# Altium PCB PCB2.PcbDoc
Units mil, origin at the board's own origin, x right, y up, seen from the top; angles counter-clockwise.
Board outline 5105.03 x 4010.03 mil, 2 copper layers (Top Layer, Bottom Layer); 6 components, 24 nets, 89 pads, 3 vias.
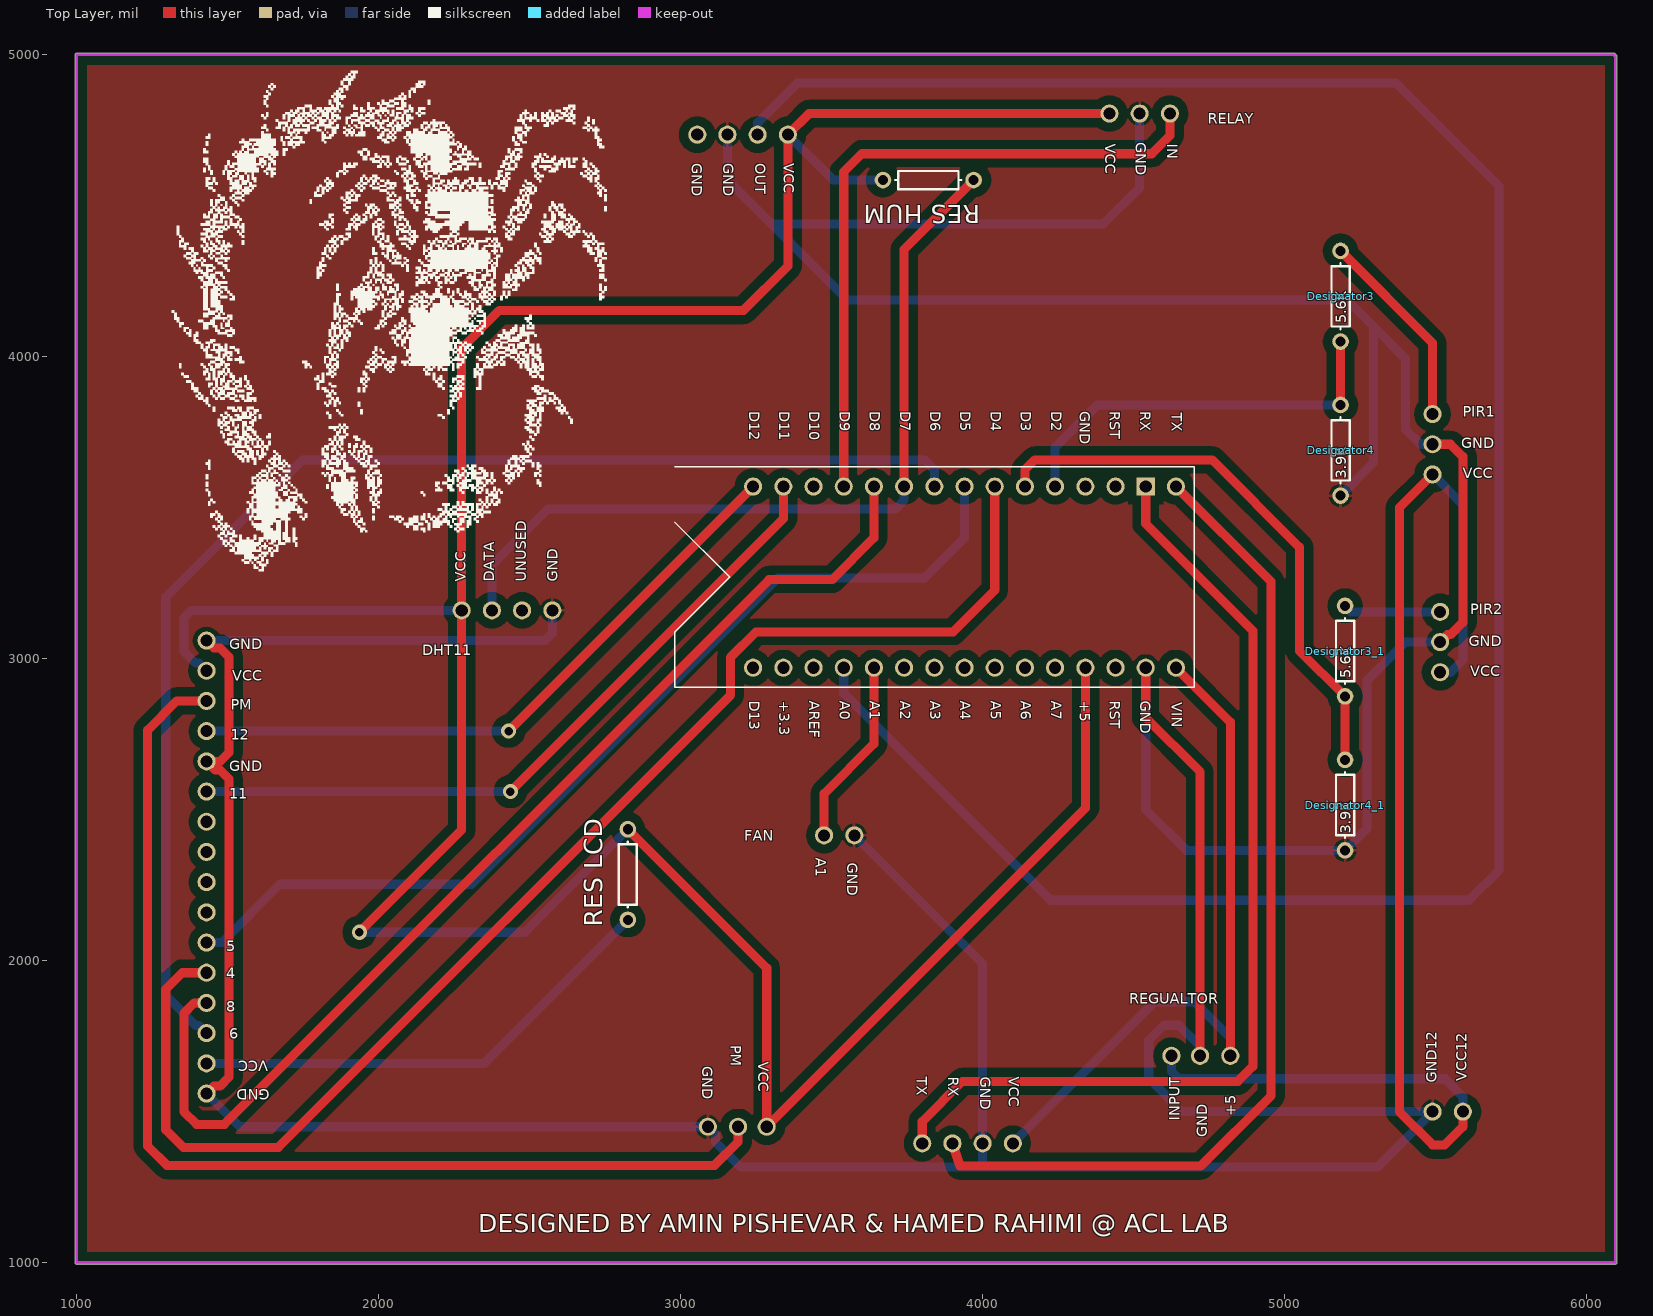
[diagram p0: Top Layer view]
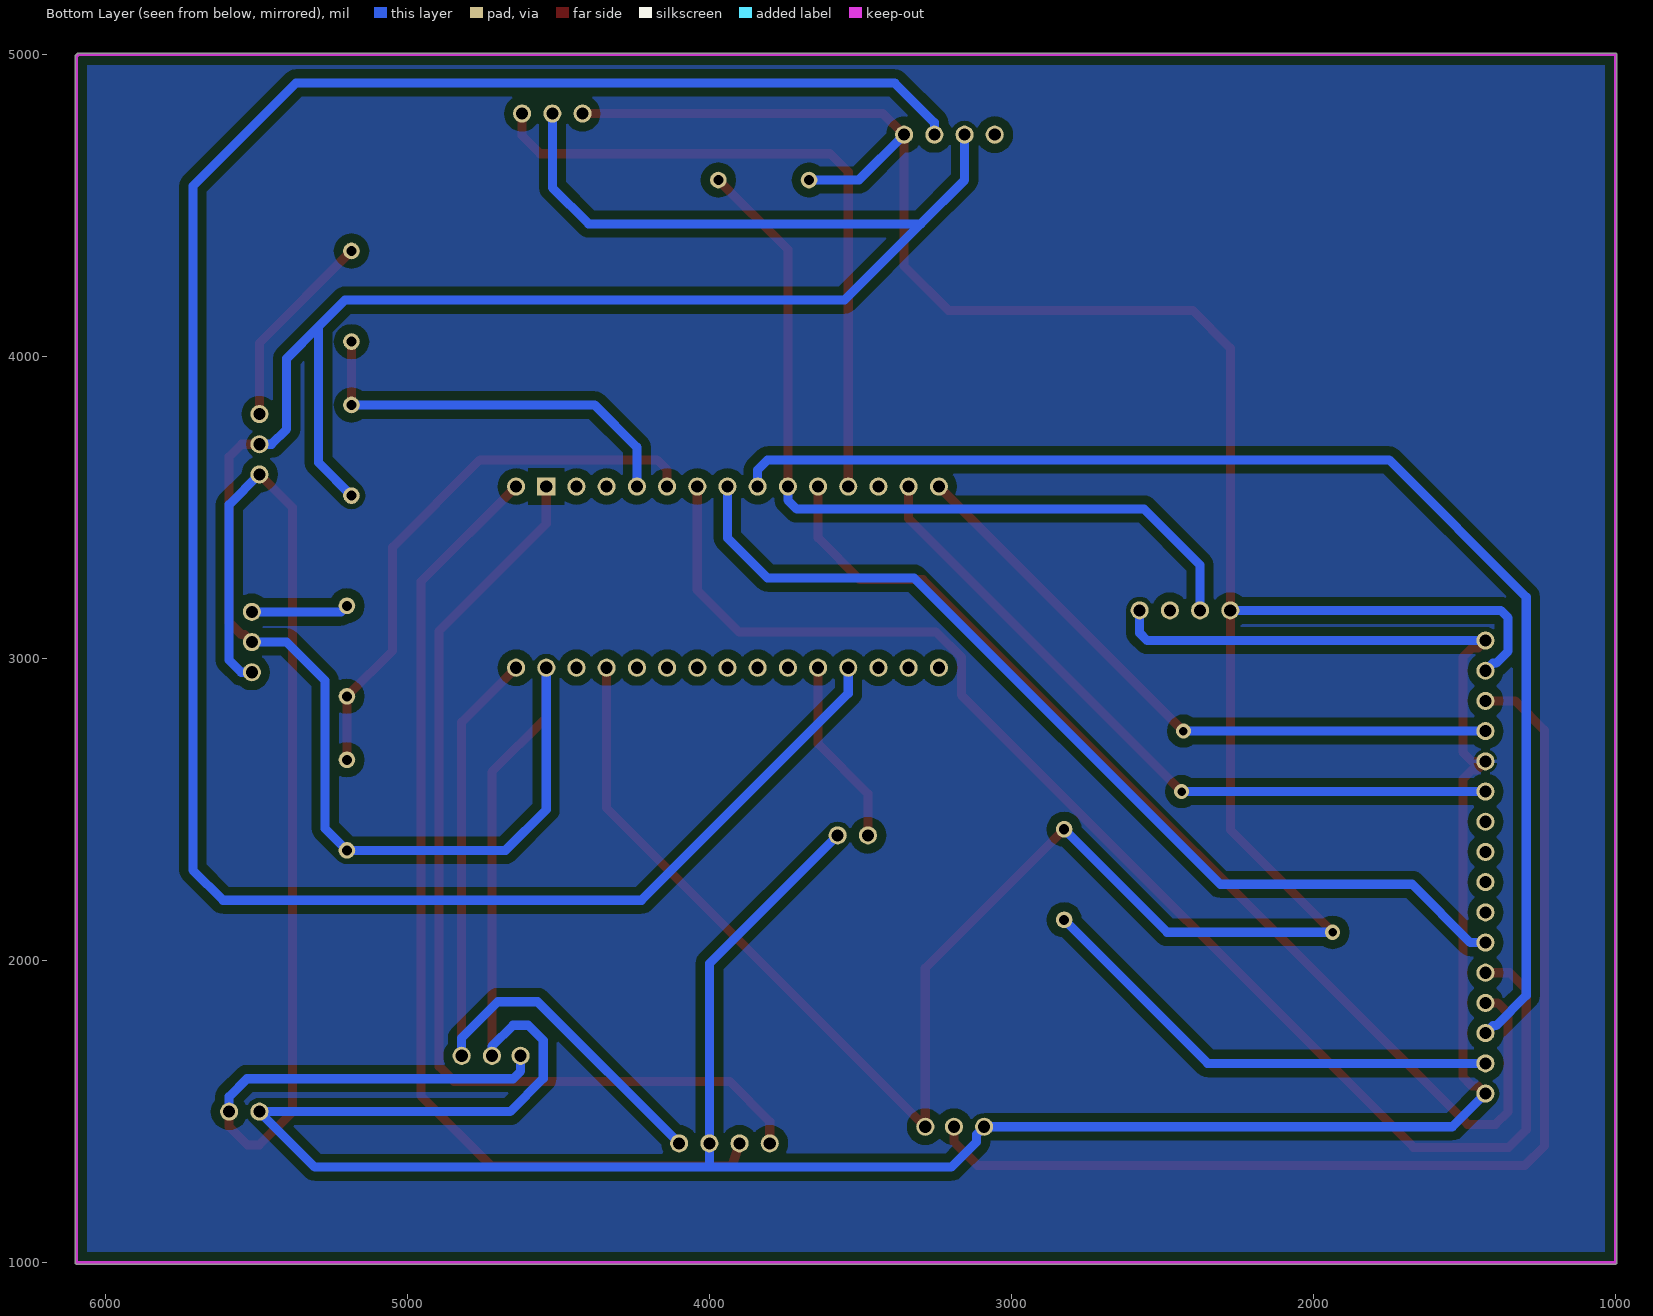
[diagram p1: Bottom Layer view, seen from below]

## Layer stack, top to bottom
Top Solder: solder mask 0.4, Solder Resist, Dk 3.5
Top Layer: signal copper 1.4
Dielectric 1: dielectric 12.6, FR-4, Dk 4.8
Bottom Layer: signal copper 1.4
Bottom Solder: solder mask 0.4, Solder Resist, Dk 3.5

## Board outline
1000,994.99 cw(c1000,1000) 994.99,1000 994.99,5000 cw(c1000,5000) 1000,5005.02 6090,5005.02 cw(c6090,5000) 6095.02,5000.02 cw(c6095,4995) 6100.02,4995 6100.02,1000 cw(c6095,1000) 6095,994.99

## Design rules (kind name [scope] priority, off if disabled: settings)
Clearance [All] p1: gap=30
PolygonConnect [All] p1: connectstyle=Relief reliefconductorwidth=10 reliefentries=4 polygonreliefangle="90 Angle" airgapwidth=10
RoutingVias [All] p1: holewidth=28 width=50 viastyle="Through Hole" minholewidth=28 minwidth=50 maxholewidth=28 maxwidth=50
SolderMaskExpansion [All] p1: expansion=4
Width [All] p1: maxlimit=40 minlimit=20 preferedwidth=30
30 further rules are at their usual default settings.

## Components (designator, comment, footprint, x,y, rotation, side; value= is the part's Value field where it differs from the comment)
Designator3 "Comment" AXIAL-0.3 5185,4200 r90 top
Designator3_1 "Comment" AXIAL-0.3 5200,3025 r90 top
Designator4 "Comment" AXIAL-0.3 5185,3690 r90 top
Designator4_1 "Comment" AXIAL-0.3 5200,2515 r90 top
"RES HUM" "Comment" AXIAL-0.3 3820,4585 r180 top
"RES LCD" "Comment" AXIAL-0.3 2825,2285 r90 top

## Footprints (in the part's own frame and the unit in brackets; to place one, negate y for a bottom-side part, rotate by r counter-clockwise, add the part's x,y. Pads: shape width x height; smd on the part's side, far side on the other; paste and mask are expansions set on the pad)
AXIAL-0.3 [mm] "Axial Device, Thru-Hole; 2 Leads; 0.3 in Pin Spacing"
  round 1.4 hole 0.85: 1(-3.81,0) 2(3.81,0)
  silkscreen extent -2.77,-0.76 2.77,0.76

## Free pads (board coordinates)
  round 60 hole 40: 0(3575,2415) 0(4420,4805) 0(5490,3610) 0(5515,2955) 0(5590,1500) 1(1430,1560) 1(3475,2415) 1(4520,4805) 1(5490,1500) 1(5490,3710) 1(5515,3055) 2(1430,1660) 2(4620,4805) 2(5490,3810) 2(5515,3155) 3(1430,1760) 3(2575,3160) 3(3055,4735) 3(3090,1450) 3(3190,1450) 3(3240,3570) 3(3800,1395) 3(4720,1685) 3(4820,1685) 4(1430,1860) 4(2475,3160) 4(3155,4735) 4(3285,1450) 4(3340,3570) 4(3900,1395) 4(4625,1685) 5(1430,1960) 5(2375,3160) 5(3255,4735) 5(3440,3570) 5(4000,1395) 6(1430,2060) 6(2275,3160) 6(3355,4735) 6(3540,3570) 6(4100,1395) 7(1430,2160) 7(3640,3570) 8(1430,2260) 8(3740,3570) 9(1430,2360) 9(3840,3570) 10(1430,2460) 10(3940,3570) 11(1430,2560) 11(4040,3570) 12(1430,2660) 12(4140,3570) 13(1430,2760) 13(4240,3570) 14(1430,2860) 14(4340,3570) 15(1430,2960) 15(4440,3570) 16(1430,3060) 17(4640,3570) 20(3240,2970) 21(3340,2970) 22(3440,2970) 23(3540,2970) 24(3640,2970) 25(3740,2970) 26(3840,2970) 27(3940,2970) 28(4040,2970) 29(4140,2970) 30(4240,2970) 31(4340,2970) 32(4440,2970) 33(4540,2970) 34(4640,2970)
  rect 60x60 hole 40: 16(4540,3570)

## Via types
v1: diameter 50, hole 28, Top Layer to Bottom Layer, 3 vias

## Nets (pads, with @x,y where several pads share a name; then routed paths per layer and width w, separated by ;. In a path a pad name is that pad's centre, name@x,y a point inside that pad or via, vN(x,y) a via of type N, cw(c..) or ccw(c..) an arc to the next point about the centre after c; other vN are vias at no path point)
2: 
3: 
4: pad.5@1430,1960 pad.11@4040,3570 | length 4572.3
  Top Layer w30: pad.5@1430,1960 1350,1960 1295,1905 1295,1440 1353,1382 1668,1382 3165,2879 3165,3004 3250,3089 3902,3089 4040,3227 pad.11@4040,3570
5: pad.6@1430,2060 pad.10@3940,3570 | length 3235
  Bottom Layer w30: pad.6@1430,2060 1480,2060 1673,2253 2307.9,2253 3321.9,3267 3807,3267 3940,3400 pad.10@3940,3570
6: pad.3@1430,1760 pad.9@3840,3570 | length 4307.5
  Bottom Layer w30: pad.3@1430,1760 1405,1785 1395,1785 1295,1885 1295,3204.03 1748.97,3658 3807,3658 3840,3625 pad.9@3840,3570
7: "RES HUM.1" pad.5@2375,3160 pad.8@3740,3570 | length 2759.3
  Top Layer w30: pad.8@3740,3570 3740,4355 3970,4585
  Bottom Layer w30: pad.5@2375,3160 2375,3310 2560,3495 3710,3495 3740,3525 pad.8@3740,3570
8: pad.4@1430,1860 pad.7@3640,3570 | length 3691.3
  Top Layer w30: pad.4@1430,1860 1390,1860 1355,1825 1355,1500 1397,1458 1489,1458 3293,3262 3502,3262 3640,3400 pad.7@3640,3570
9: pad.2@4620,4805 pad.6@3540,3570 | length 2244.7
  Top Layer w30: pad.6@3540,3570 3540,4612 3600,4672 4560,4672 4620,4732 pad.2@4620,4805
11: pad.4@3340,3570 pad.11@1430,2560 | length 2390.4
  Top Layer w30: v1(2436,2560) 3340,3464 pad.4@3340,3570
  Bottom Layer w30: pad.11@1430,2560 v1(2436,2560)
12: pad.3@3240,3570 pad.13@1430,2760 | length 2145.5
  Top Layer w30: v1(2430,2760) pad.3@3240,3570
  Bottom Layer w30: pad.13@1430,2760 v1(2430,2760)
A0: pad.5@3255,4735 pad.23 | length 7535.7
  Bottom Layer w30: pad.5@3255,4735 3255,4775 3386,4906 5369,4906 5710,4565 5710,2300 5610,2200 4225,2200 3540,2885 pad.23
A1: pad.1@3475,2415 pad.24 | length 623.3
  Top Layer w30: pad.1@3475,2415 3475,2553 3640,2718 pad.24
GND: Designator4.1 Designator4_1.1 pad.0@3575,2415 pad.1@1430,1560 pad.1@4520,4805 pad.1@5490,1500 pad.1@5490,3710 pad.1@5515,3055 pad.3@2575,3160 pad.3@3090,1450 pad.3@4720,1685 pad.4@3155,4735 pad.5@4000,1395 pad.12@1430,2660 pad.16@1430,3060 pad.33 | length 19108.6
  Top Layer w30: pad.1@1430,1560 1455,1585 1475,1585 1505,1615 1505,2601 1475,2631 1459,2631 1430,2660 1475,2660 1505,2690 1505,3005 1475,3035 1455,3035 pad.16@1430,3060 ; pad.33 4540,2805 4720,2625 pad.3@4720,1685 ; pad.1@5490,3710 5549,3710 5590,3669 5590,3120 5550,3080 5540,3080 pad.1@5515,3055
  Bottom Layer w30: pad.1@1430,1560 1540,1450 3090,1450 3115,1425 3115,1400 3199,1316 4000,1316 ; pad.16@1430,3060 2550,3060 2575,3085 pad.3@2575,3160 ; pad.4@3155,4735 3155,4585 3300,4440 ; pad.0@3575,2415 4000,1990 4000,1395 4000,1316 ; pad.1@4520,4805 4520,4560 4400,4440 3300,4440 ; pad.33 4540,2500 4675,2365 Designator4_1.1 5273,2438 5273,2928 5400,3055 pad.1@5515,3055 ; pad.3@4720,1685 4720,1716 4650,1786 4600,1786 4550,1736 4550,1610 4660,1500 5490,1500 5306,1316 4000,1316 ; Designator4.1 5294,3649 5294,4100 ; pad.1@5490,3710 5450,3710 5400,3760 5400,3994 5294,4100 ; 3300,4440 3552,4188 5206,4188 5294,4100
PIR1: Designator3.2 pad.2@5490,3810 | length 666.3
  Top Layer w30: Designator3.2 5490,4045 pad.2@5490,3810
PIR2: Designator3_1.2 pad.2@5515,3155 | length 323.3
  Bottom Layer w30: Designator3_1.2 5220,3155 pad.2@5515,3155
PM: pad.3@3190,1450 pad.14@1430,2860 | length 3676
  Top Layer w30: pad.14@1430,2860 1332,2860 1235,2763 1235,1386 1299,1322 3112,1322 3190,1400 pad.3@3190,1450
RES1: Designator3.1 Designator4.2 pad.13@4240,3570 | length 1343
  Top Layer w30: Designator4.2 Designator3.1
  Bottom Layer w30: pad.13@4240,3570 4240,3700 4380,3840 Designator4.2
RES2: Designator3_1.1 Designator4_1.2 pad.12@4140,3570 | length 1863.9
  Top Layer w30: pad.12@4140,3570 4140,3625 4173,3658 4760,3658 5049,3369 5049,3026 Designator3_1.1 Designator4_1.2
RLCDP: "RES LCD.1" pad.2@1430,1660 | length 1591.8
  Bottom Layer w30: pad.2@1430,1660 2350,1660 2825,2135
RX: pad.4@3900,1395 pad.17 | length 3353
  Top Layer w30: pad.4@3900,1395 3925,1320 4722,1320 4955,1553 4955,3255 pad.17
TX: pad.3@3800,1395 pad.16@4540,3570 | length 3309.8
  Top Layer w30: pad.3@3800,1395 3800,1467 3933,1600 4845,1600 4895,1650 4895,3092 4540,3447 pad.16@4540,3570
VCC: "RES HUM.2" "RES LCD.2" pad.0@4420,4805 pad.4@3285,1450 pad.6@2275,3160 pad.6@3355,4735 pad.15@1430,2960 pad.31 | length 10478.3
  Top Layer w30: v1(1936,2094) 2275,2433 2275,3160 2275,4028 2400,4153 3208,4153 3355,4300 3355,4735 3425,4805 pad.0@4420,4805 ; 2825,2435 3285,1975 3285,1450 4340,2505 pad.31
  Bottom Layer w30: pad.15@1430,2960 1405,2985 1395,2985 1355,3025 1355,3135 1380,3160 pad.6@2275,3160 ; v1(1936,2094) 2484,2094 2825,2435 ; pad.6@3355,4735 3505,4585 3670,4585
VCC12V: pad.0@5490,3610 pad.0@5515,2955 pad.0@5590,1500 pad.4@4625,1685 | length 4334.8
  Top Layer w30: pad.0@5490,3610 5380,3500 5380,1500 5490,1390 5530,1390 5590,1450 pad.0@5590,1500
  Bottom Layer w30: pad.4@4625,1685 4625,1634 4650,1609 5531,1609 5590,1550 pad.0@5590,1500 ; pad.0@5490,3610 5590,3510 5590,2995 5550,2955 pad.0@5515,2955
VIN: pad.3@4820,1685 pad.6@4100,1395 pad.34 | length 2382.5
  Top Layer w30: pad.34 4820,2790 pad.3@4820,1685
  Bottom Layer w30: pad.6@4100,1395 4569,1864 4700,1864 4820,1744 pad.3@4820,1685
copper on no net: | length 4
  Top Layer w20: 3240,2970 3244,2970

## Polygon pours and split planes (outlines as drawn)
GND on Bottom Layer "polygon" (solid, pour order 4): 6095,4995 6090,5000 1000,5000 1000,1000 6095,1000
GND on Top Layer "polygon" (solid, pour order 6): 6095,4995 1005,4995 1000,5000 1000,1000 6095,1000

## Keep-outs
Keep-Out Layer:
  lines w10: 1000,1000 1000,5000 6090,5000 6095,4995 6095,1000 1000,1000

## Silkscreen, mask and mechanical layers (free items; w line width, h text height)
Top Overlay:
  drawing of 351 lines, arcs and shapes, not listed
  text "RELAY" at 4745,4760 h60
  text "GND" at 4495,4710 h60 r270
  text "VCC" at 4395,4705 h60 r270
  text "IN" at 4600,4705 h60 r270
  text "GND" at 3025,4640 h60 r270
  text "GND" at 3130,4640 h60 r270
  text "OUT" at 3235,4640 h60 r270
  text "VCC" at 3330,4640 h60 r270
  text "5.6K" at 5215,4110 h60 r90
  text "D12" at 3215,3820 h60 r270
  text "D11" at 3315,3820 h60 r270
  text "D10" at 3415,3820 h60 r270
  text "D9" at 3515,3820 h60 r270
  text "D8" at 3615,3820 h60 r270
  text "D7" at 3715,3820 h60 r270
  text "D6" at 3815,3820 h60 r270
  text "D5" at 3915,3820 h60 r270
  text "D4" at 4015,3820 h60 r270
  text "D3" at 4115,3820 h60 r270
  text "D2" at 4215,3820 h60 r270
  text "GND" at 4310,3820 h60 r270
  text "RST" at 4410,3820 h60 r270
  text "RX" at 4510,3820 h60 r270
  text "TX" at 4615,3815 h60 r270
  text "PIR1" at 5590,3790 h60
  text "GND" at 5585,3685 h60
  text "3.9K" at 5215,3595 h60 r90
  text "VCC" at 5590,3585 h60
  text "VCC" at 2300,3255 h60 r90
  text "DATA" at 2395,3255 h60 r90
  text "UNUSED" at 2500,3255 h60 r90
  text "GND" at 2605,3255 h60 r90
  text "PIR2" at 5615,3135 h60
  text "GND" at 5610,3030 h60
  text "GND" at 1505,3020 h60
  text "DHT11" at 2145,3000 h60
  text "5.6K" at 5230,2935 h60 r90
  text "VCC" at 5615,2930 h60
  text "VCC" at 1515,2915 h60
  text "D13" at 3215,2860 h60 r270
  text "+3.3" at 3315,2860 h60 r270
  text "AREF" at 3415,2860 h60 r270
  text "A0" at 3515,2860 h60 r270
  text "A1" at 3615,2860 h60 r270
  text "A2" at 3715,2860 h60 r270
  text "A3" at 3815,2860 h60 r270
  text "A4" at 3915,2860 h60 r270
  text "A5" at 4015,2860 h60 r270
  text "A6" at 4115,2860 h60 r270
  text "A7" at 4215,2860 h60 r270
  text "+5" at 4310,2860 h60 r270
  text "RST" at 4410,2860 h60 r270
  text "GND" at 4510,2860 h60 r270
  text "VIN" at 4615,2855 h60 r270
  text "PM" at 1510,2820 h60
  text "12" at 1510,2720 h60
  text "GND" at 1505,2615 h60
  text "11" at 1505,2525 h60
  text "3.9K" at 5230,2420 h60 r90
  text "FAN" at 3210,2385 h60
  text "A1" at 3435,2340 h60 r270
  text "GND" at 3540,2325 h60 r270
  text "5" at 1495,2020 h60
  text "4" at 1495,1930 h60
  text "REGUALTOR" at 4485,1845 h60
  text "8" at 1495,1820 h60
  text "6" at 1505,1730 h60
  text "PM" at 3155,1720 h60 r270
  text "VCC" at 1635,1680 h60 r180
  text "VCC" at 3245,1665 h60 r270
  text "GND" at 3060,1650 h60 r270
  text "TX" at 3770,1615 h60 r270
  text "RX" at 3875,1615 h60 r270
  text "GND" at 3980,1615 h60 r270
  text "VCC" at 4075,1615 h60 r270
  text "VCC12" at 5615,1600 h60 r90
  text "GND12" at 5515,1595 h60 r90
  text "GND" at 1640,1585 h60 r180
  text "+5" at 4850,1485 h60 r90
  text "INPUT" at 4665,1470 h60 r90
  text "GND" at 4755,1415 h60 r90
  text "DESIGNED BY AMIN PISHEVAR & HAMED RAHIMI @ ACL LAB" at 2330,1100 h60